# Altium PCB DIP.PcbDoc
Units mm, origin at the board's own origin, x right, y up, seen from the top; angles counter-clockwise.
Board outline 152.4 x 101.6 mm, 2 copper layers (Top Layer, Bottom Layer); 7 components, 15 nets, 43 pads, 0 vias.
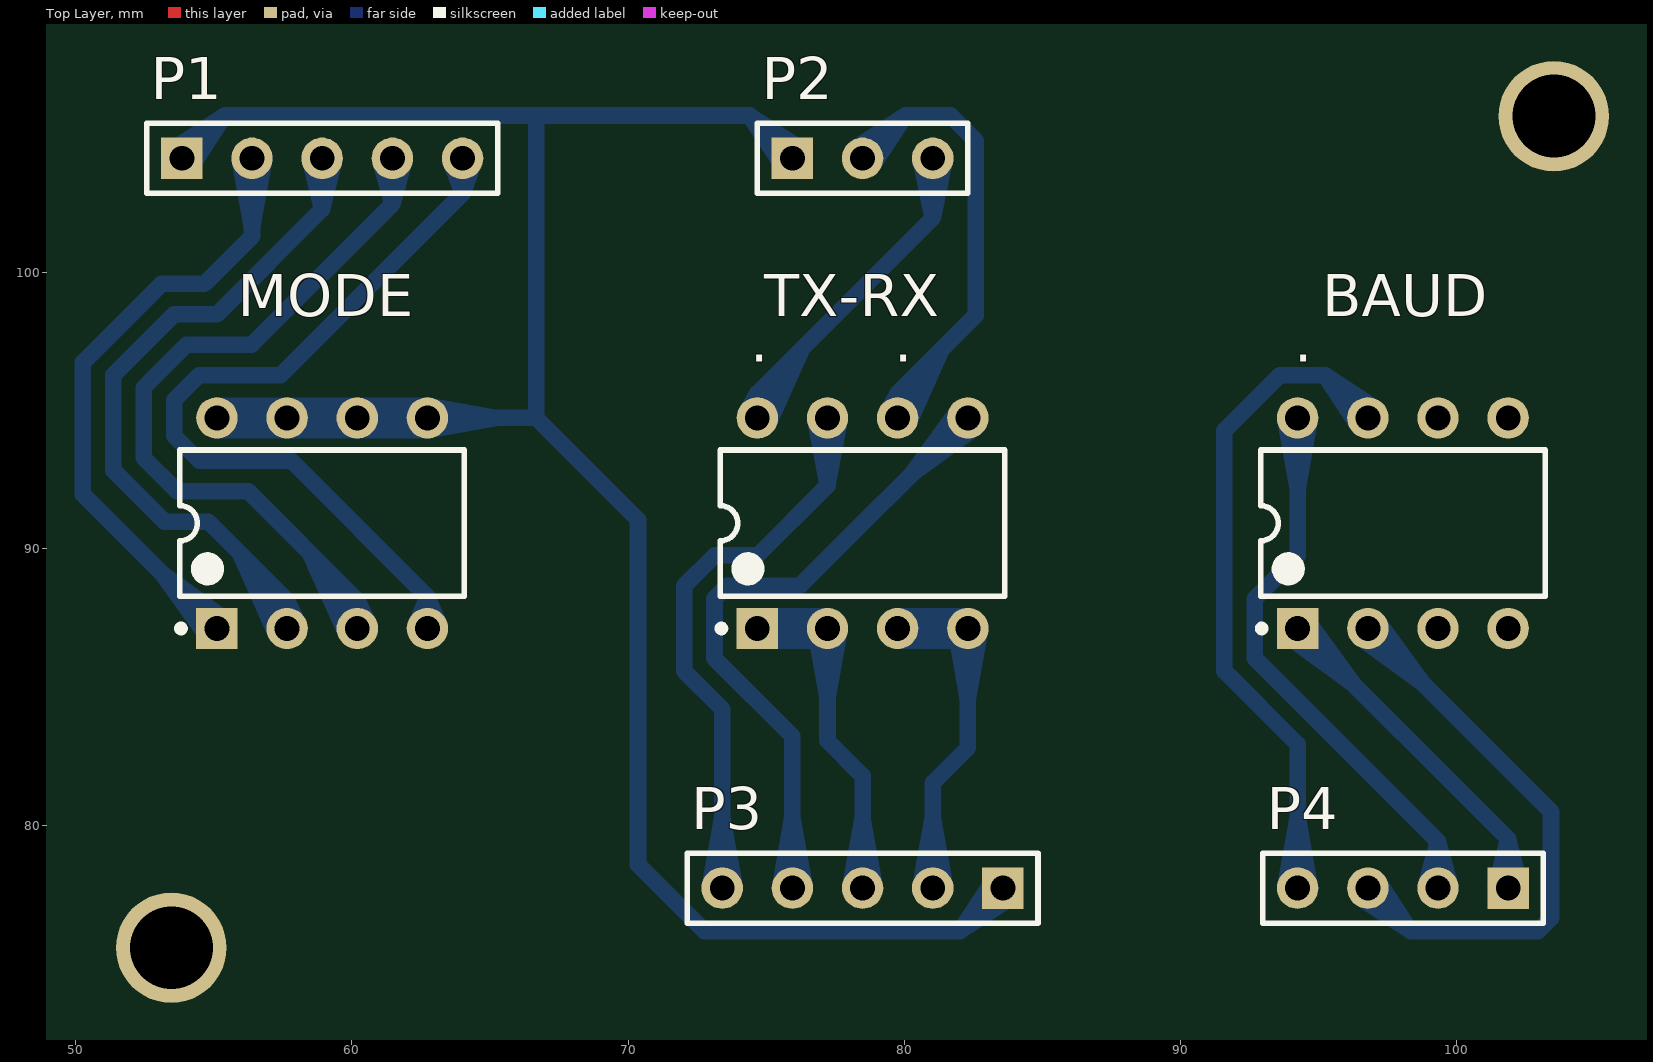
[diagram p0: Top Layer view]
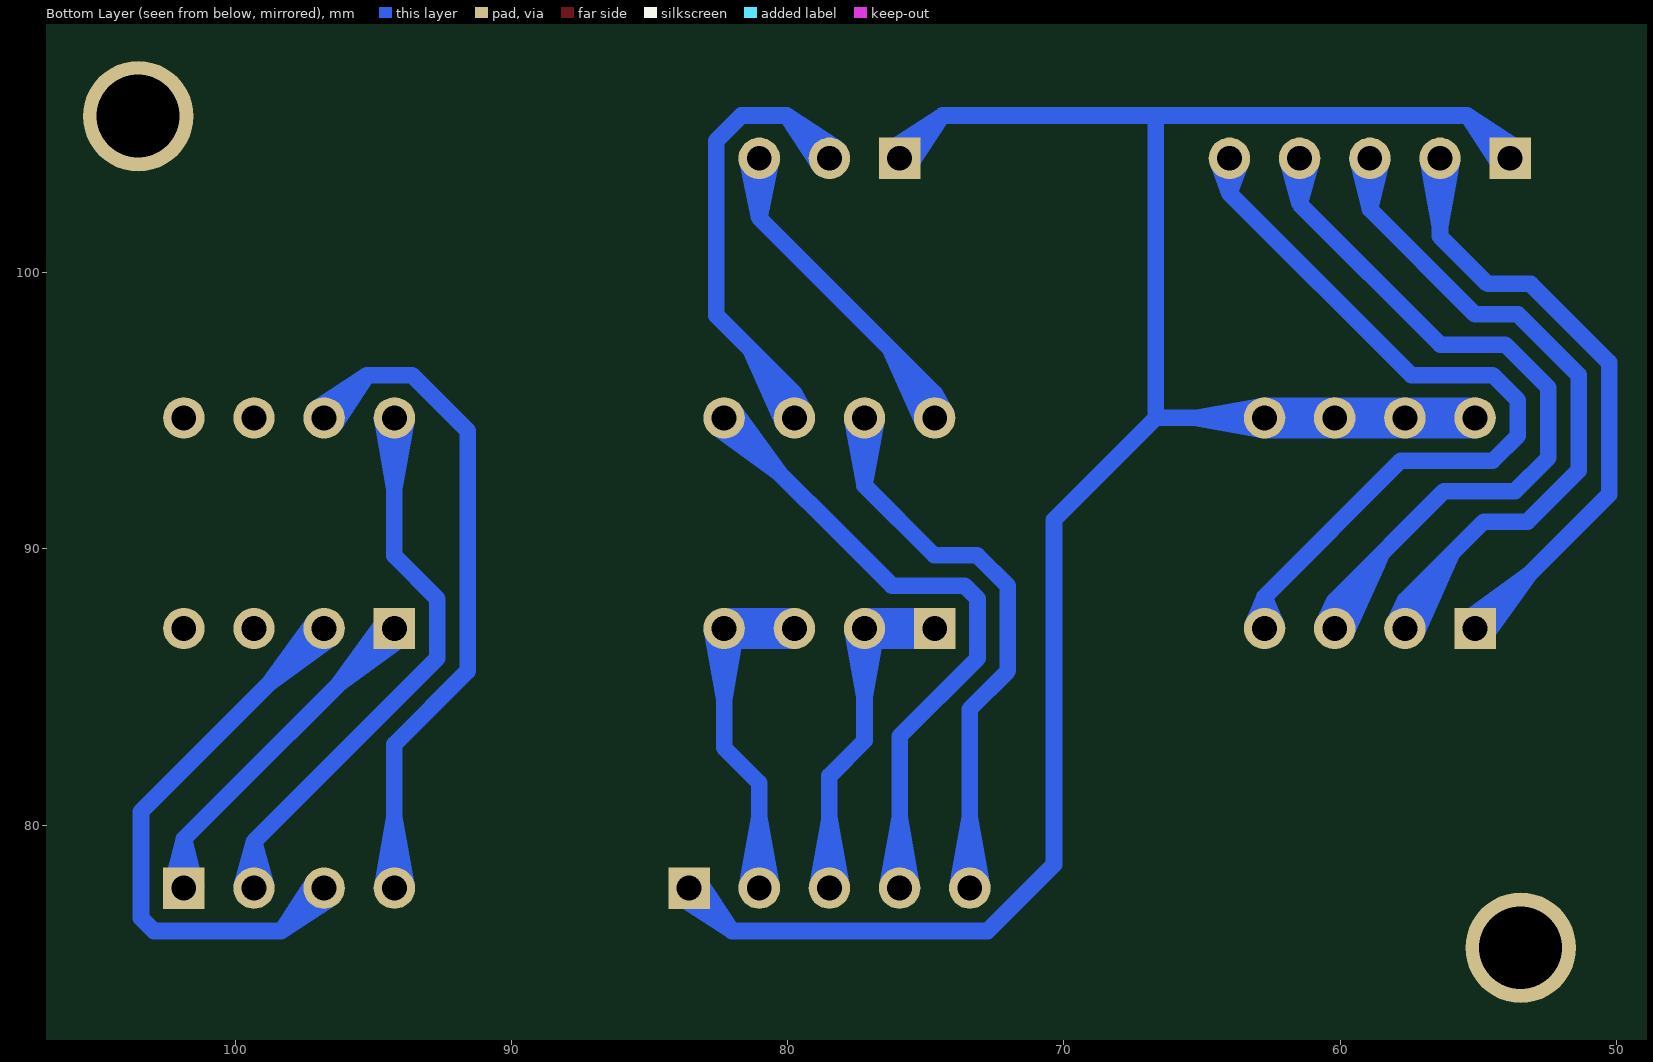
[diagram p1: Bottom Layer view, seen from below]

## Layer stack, top to bottom
Top Layer: signal copper 0.0356
Dielectric: dielectric 0.32, FR-4, Dk 4.8
Bottom Layer: signal copper 0.0356

## Board outline
25.4,25.4 177.8,25.4 177.8,127 25.4,127

## Design rules (kind name [scope] priority, off if disabled: settings)
Clearance [All] p1: gap=0.5
PolygonConnect [All] p1: connectstyle=Relief reliefconductorwidth=0.254 reliefentries=4 polygonreliefangle="90 Angle"
RoutingVias [All] p1: holewidth=0.711 width=1.27 viastyle="Through Hole" minholewidth=0.711 minwidth=1.27 maxholewidth=0.711 maxwidth=1.27
SilkscreenOverComponentPads [All] p1: minsilkscreentomaskgap=0.254
SolderMaskExpansion [All] p1: expansion=0.102
Width [All] p1: maxlimit=0.6 minlimit=0.6 preferedwidth=0.6 minimp=50.000000 maximp=50.000000 favimp=50.000000
27 further rules are at their usual default settings.

## Components (designator, comment, footprint, x,y, rotation, side; value= is the part's Value field where it differs from the comment)
BAUD "SW-DIP4" DIP-8 98.044,90.932 r90 top (schematic designator S3)
MODE "SW-DIP4" DIP-8 58.928,90.932 r90 top (schematic designator S1)
P1 "Header 5" HDR1X5 53.848,104.14 r0 top
P2 "Header 3" HDR1X3 75.946,104.14 r0 top
P3 "Header 5" HDR1X5 83.566,77.724 r180 top
P4 "Header 4" HDR1X4 101.854,77.724 r180 top
TX-RX "SW-DIP4" DIP-8 78.486,90.932 r90 top (schematic designator S2)

## Footprints (in the part's own frame and the unit in brackets; to place one, negate y for a bottom-side part, rotate by r counter-clockwise, add the part's x,y. Pads: shape width x height; smd on the part's side, far side on the other; paste and mask are expansions set on the pad)
DIP-8 [mm] "DIP; 8 Leads; Row Spacing 7.62 mm; Pitch 2.54 mm"
  rect 1.5x1.5 hole 0.9: 1(-3.81,3.81)
  round 1.5 hole 0.9: 2(-3.81,1.27) 3(-3.81,-1.27) 4(-3.81,-3.81) 5(3.81,-3.81) 6(3.81,-1.27) 7(3.81,1.27) 8(3.81,3.81)
  silkscreen extent -3.93,-5.15 2.65,5.23, body extent -3.6,-5.15 3.6,5.15, height 5.08
HDR1X3 [mm] "Connector; Header; 3 Position"
  rect 1.5x1.5 hole 0.9: 1(0,0)
  round 1.5 hole 0.9: 2(2.54,0) 3(5.08,0)
  silkscreen extent -1.27,-1.27 6.35,1.27
HDR1X4 [mm] "Connector; Header; 4 Position"
  rect 1.5x1.5 hole 0.9: 1(0,0)
  round 1.5 hole 0.9: 2(2.54,0) 3(5.08,0) 4(7.62,0)
  silkscreen extent -1.27,-1.27 8.89,1.27
HDR1X5 [mm] "Connector; Header; 5 Position"
  rect 1.5x1.5 hole 0.9: 1(0,0)
  round 1.5 hole 0.9: 2(2.54,0) 3(5.08,0) 4(7.62,0) 5(10.16,0)
  silkscreen extent -1.27,-1.27 11.43,1.27

## Part data
BAUD MODE TX-RX: "DIP Switch"
P1 P3: "Header, 5-Pin"
P2: "Header, 3-Pin"
P4: "Header, 4-Pin"

## Free pads (board coordinates)
  round 4 hole 3: 0(53.467,75.565) 0(103.505,105.664)

## Nets (pads, with @x,y where several pads share a name; then routed paths per layer and width w, separated by ;. In a path a pad name is that pad's centre, name@x,y a point inside that pad or via, vN(x,y) a via of type N, cw(c..) or ccw(c..) an arc to the next point about the centre after c; other vN are vias at no path point)
NetP1_1: MODE.5 MODE.6 MODE.7 MODE.8 P1.1 P2.1 P3.1 | length 1234.6
  Bottom Layer w0.6: P1.1@53.564,104.489 55.398,105.69 ; P1.1@53.564,104.489 55.398,105.69 ; P1.1@53.564,104.489 55.398,105.69 ; P1.1@53.564,104.489 55.398,105.69 ; P1.1 55.398,105.69 ; P1.1 55.398,105.69 ; P1.1 55.398,105.69 ; P1.1@54.197,103.856 55.398,105.69 ; P1.1@54.197,103.856 55.398,105.69 ; P1.1@54.197,103.856 55.398,105.69 ; P1.1@54.197,103.856 55.398,105.69 ; MODE.8@55.078,94.294 MODE.7@57.618,94.294 ; MODE.8@55.078,94.294 MODE.7@57.618,94.294 ; MODE.8@55.078,94.294 MODE.7@57.618,94.294 ; MODE.8@55.078,94.294 MODE.7@57.618,94.294 ; MODE.8@55.078,94.294 MODE.7@57.618,94.294 ; MODE.8@55.078,95.19 MODE.7@57.618,95.19 ; MODE.8@55.078,95.19 MODE.7@57.618,95.19 ; MODE.8@55.078,95.19 MODE.7@57.618,95.19 ; MODE.8@55.078,95.19 MODE.7@57.618,95.19 ; MODE.8@55.078,95.19 MODE.7@57.618,95.19 ; MODE.8@55.079,94.294 MODE.7@57.698,94.294 ; MODE.8@55.079,94.294 MODE.7@57.698,94.294 ; MODE.8@55.079,94.294 MODE.7@57.698,94.294 ; MODE.8@55.079,94.294 MODE.7@57.698,94.294 ; MODE.8@55.079,94.294 MODE.7@57.698,94.294 ; MODE.8@55.079,94.294 MODE.7@57.54,94.308 ; MODE.8@55.079,94.294 MODE.7@57.54,94.308 ; MODE.8@55.079,94.294 MODE.7@57.54,94.308 ; MODE.8@55.079,94.294 MODE.7@57.54,94.308 ; MODE.8@55.079,94.294 MODE.7@57.54,94.308 ; MODE.8@55.079,95.19 MODE.7@57.698,95.19 ; MODE.8@55.079,95.19 MODE.7@57.698,95.19 ; MODE.8@55.079,95.19 MODE.7@57.698,95.19 ; MODE.8@55.079,95.19 MODE.7@57.698,95.19 ; MODE.8@55.079,95.19 MODE.7@57.698,95.19 ; MODE.8@55.079,95.19 MODE.7@57.54,95.176 ; MODE.8@55.079,95.19 MODE.7@57.54,95.176 ; MODE.8@55.079,95.19 MODE.7@57.54,95.176 ; MODE.8@55.079,95.19 MODE.7@57.54,95.176 ; MODE.8@55.079,95.19 MODE.7@57.54,95.176 ; MODE.8 MODE.7 ; MODE.8 MODE.7@57.698,95.19 ; MODE.8 MODE.7 ; MODE.8 MODE.7@57.698,94.294 ; MODE.8 MODE.7 ; MODE.8 MODE.7@57.698,95.19 ; MODE.8 MODE.7 ; MODE.8 MODE.7@57.698,95.19 ; MODE.8 MODE.7 ; MODE.8 MODE.7@57.698,94.294 ; MODE.8 MODE.7 ; MODE.8 MODE.7@57.698,94.294 ; MODE.8 MODE.7 ; MODE.8 MODE.7@57.698,95.19 ; MODE.8 MODE.7 ; MODE.8 MODE.7@57.698,94.294 ; MODE.8 MODE.7 ; MODE.8 MODE.7 ; MODE.8 MODE.7@57.698,95.19 ; MODE.8 MODE.7 ; MODE.8 MODE.7@57.698,94.294 ; MODE.8 MODE.7 ; MODE.8 MODE.7@57.54,94.308 ; MODE.8 MODE.7@57.54,95.176 ; MODE.8 MODE.7@57.54,94.308 ; MODE.8 MODE.7@57.54,94.308 ; MODE.8 MODE.7@57.54,95.176 ; MODE.8 MODE.7@57.54,95.176 ; MODE.8 MODE.7@57.54,94.308 ; MODE.8 MODE.7@57.54,95.176 ; MODE.8 MODE.7@57.54,94.308 ; MODE.8 MODE.7@57.54,95.176 ; MODE.8 MODE.7 ; MODE.8 MODE.7@57.618,95.19 ; MODE.8 MODE.7@57.618,94.294 ; MODE.8 MODE.7 ; MODE.8 MODE.7@57.618,95.19 ; MODE.8 MODE.7@57.618,94.294 ; MODE.8 MODE.7 ; MODE.8 MODE.7@57.618,95.19 ; MODE.8 MODE.7@57.618,94.294 ; MODE.8 MODE.7 ; MODE.8 MODE.7@57.618,95.19 ; MODE.8 MODE.7@57.618,94.294 ; MODE.8 MODE.7 ; MODE.8 MODE.7@57.618,94.294 ; MODE.8 MODE.7@57.618,95.19 ; MODE.8 MODE.7 ; MODE.8@55.158,94.294 MODE.7 ; MODE.8@55.158,94.294 MODE.7 ; MODE.8@55.158,94.294 MODE.7 ; MODE.8@55.158,94.294 MODE.7 ; MODE.8@55.158,94.294 MODE.7 ; MODE.8@55.158,94.294 MODE.7 ; MODE.8@55.158,94.294 MODE.7 ; MODE.8@55.158,94.294 MODE.7 ; MODE.8@55.158,94.294 MODE.7 ; MODE.8@55.158,94.294 MODE.7 ; MODE.8@55.158,94.294 MODE.7 ; MODE.8@55.158,94.294 MODE.7 ; MODE.8@55.158,94.294 MODE.7 ; MODE.8@55.158,94.294 MODE.7 ; MODE.8@55.158,94.294 MODE.7 ; MODE.8@55.158,94.294 MODE.7 ; MODE.8@55.158,94.294 MODE.7 ; MODE.8@55.158,94.294 MODE.7 ; MODE.8@55.158,94.294 MODE.7 ; MODE.8@55.158,94.294 MODE.7@57.54,95.176 ; MODE.8@55.158,94.294 MODE.7@57.698,94.294 ; MODE.8@55.158,94.294 MODE.7 ; MODE.8@55.158,94.294 MODE.7@57.54,95.176 ; MODE.8@55.158,94.294 MODE.7@57.698,94.294 ; MODE.8@55.158,94.294 MODE.7 ; MODE.8@55.158,94.294 MODE.7@57.54,95.176 ; MODE.8@55.158,94.294 MODE.7@57.698,94.294 ; MODE.8@55.158,94.294 MODE.7 ; MODE.8@55.158,94.294 MODE.7@57.54,95.176 ; MODE.8@55.158,94.294 MODE.7@57.698,94.294 ; MODE.8@55.158,94.294 MODE.7 ; MODE.8@55.158,94.294 MODE.7@57.698,94.294 ; MODE.8@55.158,94.294 MODE.7@57.54,95.176 ; MODE.8@55.158,94.294 MODE.7 ; MODE.8@55.158,95.19 MODE.7 ; MODE.8@55.158,95.19 MODE.7 ; MODE.8@55.158,95.19 MODE.7 ; MODE.8@55.158,95.19 MODE.7 ; MODE.8@55.158,95.19 MODE.7 ; MODE.8@55.158,95.19 MODE.7 ; MODE.8@55.158,95.19 MODE.7 ; MODE.8@55.158,95.19 MODE.7 ; MODE.8@55.158,95.19 MODE.7 ; MODE.8@55.158,95.19 MODE.7 ; MODE.8@55.158,95.19 MODE.7 ; MODE.8@55.158,95.19 MODE.7 ; MODE.8@55.158,95.19 MODE.7 ; MODE.8@55.158,95.19 MODE.7 ; MODE.8@55.158,95.19 MODE.7 ; MODE.8@55.158,95.19 MODE.7 ; MODE.8@55.158,95.19 MODE.7 ; MODE.8@55.158,95.19 MODE.7 ; MODE.8@55.158,95.19 MODE.7 ; MODE.8@55.158,95.19 MODE.7@57.698,95.19 ; MODE.8@55.158,95.19 MODE.7@57.54,94.308 ; MODE.8@55.158,95.19 MODE.7 ; MODE.8@55.158,95.19 MODE.7@57.698,95.19 ; MODE.8@55.158,95.19 MODE.7@57.54,94.308 ; MODE.8@55.158,95.19 MODE.7 ; MODE.8@55.158,95.19 MODE.7@57.698,95.19 ; MODE.8@55.158,95.19 MODE.7@57.54,94.308 ; MODE.8@55.158,95.19 MODE.7 ; MODE.8@55.158,95.19 MODE.7@57.698,95.19 ; MODE.8@55.158,95.19 MODE.7@57.54,94.308 ; MODE.8@55.158,95.19 MODE.7 ; MODE.8@55.158,95.19 MODE.7@57.54,94.308 ; MODE.8@55.158,95.19 MODE.7@57.698,95.19 ; MODE.8@55.158,95.19 MODE.7 ; MODE.8@55.233,94.307 MODE.7@57.698,95.19 ; MODE.8@55.233,94.307 MODE.7@57.698,95.19 ; MODE.8@55.233,94.307 MODE.7@57.698,95.19 ; MODE.8@55.233,94.307 MODE.7@57.698,95.19 ; MODE.8@55.233,94.307 MODE.7@57.698,95.19 ; MODE.8@55.233,95.177 MODE.7@57.698,94.294 ; MODE.8@55.233,95.177 MODE.7@57.698,94.294 ; MODE.8@55.233,95.177 MODE.7@57.698,94.294 ; MODE.8@55.233,95.177 MODE.7@57.698,94.294 ; MODE.8@55.233,95.177 MODE.7@57.698,94.294 ; MODE.8@55.236,94.308 MODE.7@57.618,95.19 ; MODE.8@55.236,94.308 MODE.7@57.618,95.19 ; MODE.8@55.236,94.308 MODE.7@57.618,95.19 ; MODE.8@55.236,94.308 MODE.7@57.618,95.19 ; MODE.8@55.236,94.308 MODE.7@57.618,95.19 ; MODE.8@55.236,95.176 MODE.7@57.618,94.294 ; MODE.8@55.236,95.176 MODE.7@57.618,94.294 ; MODE.8@55.236,95.176 MODE.7@57.618,94.294 ; MODE.8@55.236,95.176 MODE.7@57.618,94.294 ; MODE.8@55.236,95.176 MODE.7@57.618,94.294 ; MODE.8@55.238,94.308 MODE.7@57.54,95.176 ; MODE.8@55.238,94.308 MODE.7@57.54,95.176 ; MODE.8@55.238,94.308 MODE.7@57.54,95.176 ; MODE.8@55.238,94.308 MODE.7@57.54,95.176 ; MODE.8@55.238,94.308 MODE.7@57.54,95.176 ; MODE.8@55.238,95.176 MODE.7@57.54,94.308 ; MODE.8@55.238,95.176 MODE.7@57.54,94.308 ; MODE.8@55.238,95.176 MODE.7@57.54,94.308 ; MODE.8@55.238,95.176 MODE.7@57.54,94.308 ; MODE.8@55.238,95.176 MODE.7@57.54,94.308 ; 55.398,105.69 66.675,105.69 ; MODE.7@57.618,94.294 MODE.6@60.158,94.294 ; MODE.7@57.618,94.294 MODE.6@60.158,94.294 ; MODE.7@57.618,94.294 MODE.6@60.158,94.294 ; MODE.7@57.618,94.294 MODE.6@60.158,94.294 ; MODE.7@57.618,95.19 MODE.6@60.158,95.19 ; MODE.7@57.618,95.19 MODE.6@60.158,95.19 ; MODE.7@57.618,95.19 MODE.6@60.158,95.19 ; MODE.7@57.618,95.19 MODE.6@60.158,95.19 ; MODE.7@57.619,94.294 MODE.6@60.08,94.308 ; MODE.7@57.619,94.294 MODE.6@60.238,94.294 ; MODE.7@57.619,94.294 MODE.6@60.08,94.308 ; MODE.7@57.619,94.294 MODE.6@60.08,94.308 ; MODE.7@57.619,94.294 MODE.6@60.238,94.294 ; MODE.7@57.619,94.294 MODE.6@60.238,94.294 ; MODE.7@57.619,94.294 MODE.6@60.08,94.308 ; MODE.7@57.619,94.294 MODE.6@60.238,94.294 ; MODE.7@57.619,95.19 MODE.6@60.238,95.19 ; MODE.7@57.619,95.19 MODE.6@60.08,95.176 ; MODE.7@57.619,95.19 MODE.6@60.238,95.19 ; MODE.7@57.619,95.19 MODE.6@60.238,95.19 ; MODE.7@57.619,95.19 MODE.6@60.08,95.176 ; MODE.7@57.619,95.19 MODE.6@60.08,95.176 ; MODE.7@57.619,95.19 MODE.6@60.238,95.19 ; MODE.7@57.619,95.19 MODE.6@60.08,95.176 ; MODE.7 MODE.6@60.238,95.19 ; MODE.7 MODE.6@60.08,94.308 ; MODE.7 MODE.6@60.08,95.176 ; MODE.7 MODE.6@60.238,94.294 ; MODE.7 MODE.6 ; MODE.7 MODE.6@60.238,95.19 ; MODE.7 MODE.6@60.08,94.308 ; MODE.7 MODE.6 ; MODE.7 MODE.6@60.238,95.19 ; MODE.7 MODE.6@60.08,94.308 ; MODE.7 MODE.6 ; MODE.7 MODE.6@60.08,95.176 ; MODE.7 MODE.6@60.238,94.294 ; MODE.7 MODE.6 ; MODE.7 MODE.6@60.08,95.176 ; MODE.7 MODE.6@60.238,94.294 ; MODE.7 MODE.6 ; MODE.7 MODE.6 ; MODE.7 MODE.6@60.08,94.308 ; MODE.7 MODE.6@60.238,95.19 ; MODE.7 MODE.6@60.238,94.294 ; MODE.7 MODE.6@60.08,95.176 ; MODE.7 MODE.6@60.158,95.19 ; MODE.7 MODE.6@60.158,94.294 ; MODE.7 MODE.6 ; MODE.7 MODE.6@60.158,95.19 ; MODE.7 MODE.6@60.158,94.294 ; MODE.7 MODE.6 ; MODE.7 MODE.6@60.158,95.19 ; MODE.7 MODE.6@60.158,94.294 ; MODE.7 MODE.6 ; MODE.7 MODE.6@60.158,94.294 ; MODE.7 MODE.6@60.158,95.19 ; MODE.7@57.698,94.294 MODE.6 ; MODE.7@57.698,94.294 MODE.6 ; MODE.7@57.698,94.294 MODE.6 ; MODE.7@57.698,94.294 MODE.6 ; MODE.7@57.698,94.294 MODE.6 ; MODE.7@57.698,94.294 MODE.6 ; MODE.7@57.698,94.294 MODE.6 ; MODE.7@57.698,94.294 MODE.6 ; MODE.7@57.698,94.294 MODE.6 ; MODE.7@57.698,94.294 MODE.6@60.08,95.176 ; MODE.7@57.698,94.294 MODE.6@60.238,94.294 ; MODE.7@57.698,94.294 MODE.6 ; MODE.7@57.698,94.294 MODE.6@60.08,95.176 ; MODE.7@57.698,94.294 MODE.6@60.238,94.294 ; MODE.7@57.698,94.294 MODE.6 ; MODE.7@57.698,94.294 MODE.6@60.08,95.176 ; MODE.7@57.698,94.294 MODE.6@60.238,94.294 ; MODE.7@57.698,94.294 MODE.6 ; MODE.7@57.698,94.294 MODE.6@60.238,94.294 ; MODE.7@57.698,94.294 MODE.6@60.08,95.176 ; MODE.7@57.698,95.19 MODE.6 ; MODE.7@57.698,95.19 MODE.6 ; MODE.7@57.698,95.19 MODE.6 ; MODE.7@57.698,95.19 MODE.6 ; MODE.7@57.698,95.19 MODE.6 ; MODE.7@57.698,95.19 MODE.6 ; MODE.7@57.698,95.19 MODE.6 ; MODE.7@57.698,95.19 MODE.6 ; MODE.7@57.698,95.19 MODE.6 ; MODE.7@57.698,95.19 MODE.6@60.238,95.19 ; MODE.7@57.698,95.19 MODE.6@60.08,94.308 ; MODE.7@57.698,95.19 MODE.6 ; MODE.7@57.698,95.19 MODE.6@60.238,95.19 ; MODE.7@57.698,95.19 MODE.6@60.08,94.308 ; MODE.7@57.698,95.19 MODE.6 ; MODE.7@57.698,95.19 MODE.6@60.238,95.19 ; MODE.7@57.698,95.19 MODE.6@60.08,94.308 ; MODE.7@57.698,95.19 MODE.6 ; MODE.7@57.698,95.19 MODE.6@60.08,94.308 ; MODE.7@57.698,95.19 MODE.6@60.238,95.19 ; MODE.7@57.773,94.307 MODE.6@60.238,95.19 ; MODE.7@57.773,94.307 MODE.6@60.238,95.19 ; MODE.7@57.773,94.307 MODE.6@60.238,95.19 ; MODE.7@57.773,94.307 MODE.6@60.238,95.19 ; MODE.7@57.773,95.177 MODE.6@60.238,94.294 ; MODE.7@57.773,95.177 MODE.6@60.238,94.294 ; MODE.7@57.773,95.177 MODE.6@60.238,94.294 ; MODE.7@57.773,95.177 MODE.6@60.238,94.294 ; MODE.7@57.776,94.308 MODE.6@60.158,95.19 ; MODE.7@57.776,94.308 MODE.6@60.158,95.19 ; MODE.7@57.776,94.308 MODE.6@60.158,95.19 ; MODE.7@57.776,94.308 MODE.6@60.158,95.19 ; MODE.7@57.776,95.176 MODE.6@60.158,94.294 ; MODE.7@57.776,95.176 MODE.6@60.158,94.294 ; MODE.7@57.776,95.176 MODE.6@60.158,94.294 ; MODE.7@57.776,95.176 MODE.6@60.158,94.294 ; MODE.7@57.778,94.308 MODE.6@60.08,95.176 ; MODE.7@57.778,94.308 MODE.6@60.08,95.176 ; MODE.7@57.778,94.308 MODE.6@60.08,95.176 ; MODE.7@57.778,94.308 MODE.6@60.08,95.176 ; MODE.7@57.778,95.176 MODE.6@60.08,94.308 ; MODE.7@57.778,95.176 MODE.6@60.08,94.308 ; MODE.7@57.778,95.176 MODE.6@60.08,94.308 ; MODE.7@57.778,95.176 MODE.6@60.08,94.308 ; MODE.6@60.158,94.294 MODE.5@62.698,94.294 ; MODE.6@60.158,94.294 MODE.5@62.698,94.294 ; MODE.6@60.158,94.294 MODE.5@62.698,94.294 ; MODE.6@60.158,94.294 MODE.5@62.698,94.294 ; MODE.6@60.158,95.19 MODE.5@62.698,95.19 ; MODE.6@60.158,95.19 MODE.5@62.698,95.19 ; MODE.6@60.158,95.19 MODE.5@62.698,95.19 ; MODE.6@60.158,95.19 MODE.5@62.698,95.19 ; MODE.6@60.159,94.294 MODE.5@62.62,94.308 ; MODE.6@60.159,94.294 MODE.5@62.778,94.294 ; MODE.6@60.159,94.294 MODE.5@62.62,94.308 ; MODE.6@60.159,94.294 MODE.5@62.62,94.308 ; MODE.6@60.159,94.294 MODE.5@62.778,94.294 ; MODE.6@60.159,94.294 MODE.5@62.778,94.294 ; MODE.6@60.159,94.294 MODE.5@62.62,94.308 ; MODE.6@60.159,94.294 MODE.5@62.778,94.294 ; MODE.6@60.159,95.19 MODE.5@62.778,95.19 ; MODE.6@60.159,95.19 MODE.5@62.62,95.176 ; MODE.6@60.159,95.19 MODE.5@62.778,95.19 ; MODE.6@60.159,95.19 MODE.5@62.778,95.19 ; MODE.6@60.159,95.19 MODE.5@62.62,95.176 ; MODE.6@60.159,95.19 MODE.5@62.62,95.176 ; MODE.6@60.159,95.19 MODE.5@62.778,95.19 ; MODE.6@60.159,95.19 MODE.5@62.62,95.176 ; MODE.6 MODE.5@62.778,95.19 ; MODE.6 MODE.5@62.62,94.308 ; MODE.6 MODE.5@62.62,95.176 ; MODE.6 MODE.5@62.778,94.294 ; MODE.6 MODE.5 ; MODE.6 MODE.5@62.778,95.19 ; MODE.6 MODE.5@62.62,94.308 ; MODE.6 MODE.5 ; MODE.6 MODE.5@62.778,95.19 ; MODE.6 MODE.5@62.62,94.308 ; MODE.6 MODE.5 ; MODE.6 MODE.5@62.62,95.176 ; MODE.6 MODE.5@62.778,94.294 ; MODE.6 MODE.5 ; MODE.6 MODE.5@62.62,95.176 ; MODE.6 MODE.5@62.778,94.294 ; MODE.6 MODE.5 ; MODE.6 MODE.5 ; MODE.6 MODE.5@62.62,94.308 ; MODE.6 MODE.5@62.778,95.19 ; MODE.6 MODE.5@62.778,94.294 ; MODE.6 MODE.5@62.62,95.176 ; MODE.6 MODE.5@62.698,95.19 ; MODE.6 MODE.5@62.698,94.294 ; MODE.6 MODE.5 ; MODE.6 MODE.5@62.698,95.19 ; MODE.6 MODE.5@62.698,94.294 ; MODE.6 MODE.5 ; MODE.6 MODE.5@62.698,95.19 ; MODE.6 MODE.5@62.698,94.294 ; MODE.6 MODE.5 ; MODE.6 MODE.5@62.698,94.294 ; MODE.6 MODE.5@62.698,95.19 ; MODE.6@60.238,94.294 MODE.5 ; MODE.6@60.238,94.294 MODE.5 ; MODE.6@60.238,94.294 MODE.5 ; MODE.6@60.238,94.294 MODE.5 ; MODE.6@60.238,94.294 MODE.5 ; MODE.6@60.238,94.294 MODE.5 ; MODE.6@60.238,94.294 MODE.5 ; MODE.6@60.238,94.294 MODE.5 ; MODE.6@60.238,94.294 MODE.5 ; MODE.6@60.238,94.294 MODE.5@62.62,95.176 ; MODE.6@60.238,94.294 MODE.5@62.778,94.294 ; MODE.6@60.238,94.294 MODE.5 ; MODE.6@60.238,94.294 MODE.5@62.62,95.176 ; MODE.6@60.238,94.294 MODE.5@62.778,94.294 ; MODE.6@60.238,94.294 MODE.5 ; MODE.6@60.238,94.294 MODE.5@62.62,95.176 ; MODE.6@60.238,94.294 MODE.5@62.778,94.294 ; MODE.6@60.238,94.294 MODE.5 ; MODE.6@60.238,94.294 MODE.5@62.778,94.294 ; MODE.6@60.238,94.294 MODE.5@62.62,95.176 ; MODE.6@60.238,95.19 MODE.5 ; MODE.6@60.238,95.19 MODE.5 ; MODE.6@60.238,95.19 MODE.5 ; MODE.6@60.238,95.19 MODE.5 ; MODE.6@60.238,95.19 MODE.5 ; MODE.6@60.238,95.19 MODE.5 ; MODE.6@60.238,95.19 MODE.5 ; MODE.6@60.238,95.19 MODE.5 ; MODE.6@60.238,95.19 MODE.5 ; MODE.6@60.238,95.19 MODE.5@62.778,95.19 ; MODE.6@60.238,95.19 MODE.5@62.62,94.308 ; MODE.6@60.238,95.19 MODE.5 ; MODE.6@60.238,95.19 MODE.5@62.778,95.19 ; MODE.6@60.238,95.19 MODE.5@62.62,94.308 ; MODE.6@60.238,95.19 MODE.5 ; MODE.6@60.238,95.19 MODE.5@62.778,95.19 ; MODE.6@60.238,95.19 MODE.5@62.62,94.308 ; MODE.6@60.238,95.19 MODE.5 ; MODE.6@60.238,95.19 MODE.5@62.62,94.308 ; MODE.6@60.238,95.19 MODE.5@62.778,95.19 ; MODE.6@60.313,94.307 MODE.5@62.778,95.19 ; MODE.6@60.313,94.307 MODE.5@62.778,95.19 ; MODE.6@60.313,94.307 MODE.5@62.778,95.19 ; MODE.6@60.313,94.307 MODE.5@62.778,95.19 ; MODE.6@60.313,95.177 MODE.5@62.778,94.294 ; MODE.6@60.313,95.177 MODE.5@62.778,94.294 ; MODE.6@60.313,95.177 MODE.5@62.778,94.294 ; MODE.6@60.313,95.177 MODE.5@62.778,94.294 ; MODE.6@60.316,94.308 MODE.5@62.698,95.19 ; MODE.6@60.316,94.308 MODE.5@62.698,95.19 ; MODE.6@60.316,94.308 MODE.5@62.698,95.19 ; MODE.6@60.316,94.308 MODE.5@62.698,95.19 ; MODE.6@60.316,95.176 MODE.5@62.698,94.294 ; MODE.6@60.316,95.176 MODE.5@62.698,94.294 ; MODE.6@60.316,95.176 MODE.5@62.698,94.294 ; MODE.6@60.316,95.176 MODE.5@62.698,94.294 ; MODE.6@60.318,94.308 MODE.5@62.62,95.176 ; MODE.6@60.318,94.308 MODE.5@62.62,95.176 ; MODE.6@60.318,94.308 MODE.5@62.62,95.176 ; MODE.6@60.318,94.308 MODE.5@62.62,95.176 ; MODE.6@60.318,95.176 MODE.5@62.62,94.308 ; MODE.6@60.318,95.176 MODE.5@62.62,94.308 ; MODE.6@60.318,95.176 MODE.5@62.62,94.308 ; MODE.6@60.318,95.176 MODE.5@62.62,94.308 ; MODE.5 65.288,94.742 ; MODE.5 65.288,94.742 ; MODE.5 66.675,94.742 ; MODE.5@62.778,94.294 65.288,94.742 ; MODE.5@62.778,94.294 65.288,94.742 ; MODE.5@62.778,94.294 65.288,94.742 ; MODE.5@62.778,94.294 65.288,94.742 ; MODE.5@62.778,95.19 65.288,94.742 ; MODE.5@62.778,95.19 65.288,94.742 ; MODE.5@62.778,95.19 65.288,94.742 ; MODE.5@62.778,95.19 65.288,94.742 ; 66.675,94.742 70.358,91.059 70.358,78.58 72.764,76.174 82.016,76.174 ; 66.675,94.742 66.675,105.69 ; 66.675,105.69 74.396,105.69 ; 74.396,105.69 P2.1@76.23,104.489 ; 74.396,105.69 P2.1@75.597,103.856 ; 74.396,105.69 P2.1 ; 74.396,105.69 P2.1@76.23,104.489 ; 74.396,105.69 P2.1@75.597,103.856 ; 74.396,105.69 P2.1 ; 74.396,105.69 P2.1@76.23,104.489 ; 74.396,105.69 P2.1@75.597,103.856 ; 74.396,105.69 P2.1 ; 74.396,105.69 P2.1@75.597,103.856 ; 74.396,105.69 P2.1@76.23,104.489 ; 82.016,76.174 P3.1 ; 82.016,76.174 P3.1@83.217,78.008 ; 82.016,76.174 P3.1@83.85,77.375 ; 82.016,76.174 P3.1 ; 82.016,76.174 P3.1@83.217,78.008 ; 82.016,76.174 P3.1@83.85,77.375 ; 82.016,76.174 P3.1 ; 82.016,76.174 P3.1@83.217,78.008 ; 82.016,76.174 P3.1@83.85,77.375 ; 82.016,76.174 P3.1 ; 82.016,76.174 P3.1@83.217,78.008 ; 82.016,76.174 P3.1@83.85,77.375 ; 82.016,76.174 P3.1 ; 82.016,76.174 P3.1@83.85,77.375 ; 82.016,76.174 P3.1@83.217,78.008 ; 82.016,76.174 P3.1
NetP1_2: MODE.1 P1.2 | length 103.6
  Bottom Layer w0.6: 53.095,89.145 MODE.1 ; 53.095,89.145 MODE.1@55.41,87.464 ; 53.095,89.145 MODE.1@54.776,86.83 ; 53.095,89.145 MODE.1 ; 53.095,89.145 MODE.1@55.41,87.464 ; 53.095,89.145 MODE.1@54.776,86.83 ; 53.095,89.145 MODE.1 ; 53.095,89.145 MODE.1@55.41,87.464 ; 53.095,89.145 MODE.1@54.776,86.83 ; 53.095,89.145 MODE.1 ; 53.095,89.145 MODE.1@55.41,87.464 ; 53.095,89.145 MODE.1@54.776,86.83 ; 53.095,89.145 MODE.1@54.776,86.83 ; 53.095,89.145 MODE.1@55.41,87.464 ; 53.095,89.145 MODE.1 ; MODE.1 50.268,91.972 50.268,96.751 53.109,99.592 54.665,99.592 56.388,101.315 P1.2 ; P1.2@55.94,104.1 56.388,101.59 ; P1.2@55.94,104.1 56.388,101.59 ; P1.2@55.94,104.1 56.388,101.59 ; P1.2@55.94,104.1 56.388,101.59 ; P1.2@55.94,104.1 56.388,101.59 ; 56.388,101.59 P1.2 ; 56.388,101.59 P1.2@56.836,104.1 ; 56.388,101.59 P1.2 ; 56.388,101.59 P1.2@56.836,104.1 ; 56.388,101.59 P1.2 ; 56.388,101.59 P1.2@56.836,104.1 ; 56.388,101.59 P1.2 ; 56.388,101.59 P1.2@56.836,104.1 ; 56.388,101.59 P1.2@56.836,104.1 ; 56.388,101.59 P1.2
NetP1_3: MODE.2 P1.3 | length 120.7
  Bottom Layer w0.6: MODE.2@57.254,86.924 56.241,89.501 ; MODE.2@57.258,86.916 56.232,89.397 ; MODE.2@57.263,86.906 56.134,89.435 ; MODE.2@57.658,87.031 MODE.2 ; MODE.2@57.658,87.213 MODE.2 ; MODE.2@58.012,87.399 56.134,89.435 ; MODE.2@58.018,87.392 56.232,89.397 ; MODE.2@58.025,87.383 56.241,89.501 ; 55.951,89.845 MODE.2 ; 55.951,89.845 58.022,87.387 55.951,89.845 ; 55.951,89.845 57.261,86.91 55.951,89.845 ; 55.951,89.845 MODE.2 ; 56.134,89.435 MODE.2 ; 56.232,89.397 MODE.2 ; 56.241,89.501 MODE.2 ; MODE.2@57.219,87.222 57.658,88.138 ; MODE.2@57.219,87.222 57.658,88.138 ; MODE.2@57.219,87.222 57.658,88.138 ; MODE.2@57.219,87.222 57.658,88.138 ; MODE.2@57.219,87.222 57.658,88.138 ; MODE.2@57.219,87.222 57.658,88.138 ; MODE.2@57.219,87.222 57.658,88.138 ; MODE.2@57.219,87.222 57.658,88.138 ; MODE.2@57.219,87.222 57.658,88.138 ; MODE.2 57.658,88.138 ; MODE.2 57.658,88.138 ; MODE.2 57.658,88.138 ; MODE.2 57.658,88.138 ; MODE.2 57.658,88.138 ; MODE.2 57.658,88.138 ; MODE.2 57.658,88.138 ; 57.658,88.138 MODE.2@58.097,87.222 ; 57.658,88.138 MODE.2@58.097,87.222 ; 57.658,88.138 MODE.2@58.097,87.222 ; 57.658,88.138 MODE.2@58.097,87.222 ; 57.658,88.138 MODE.2@58.097,87.222 ; 57.658,88.138 MODE.2@58.097,87.222 ; 57.658,88.138 MODE.2@58.097,87.222 ; 57.658,88.138 54.804,90.992 53.217,90.992 51.368,92.841 51.368,96.295 53.565,98.492 55.12,98.492 58.928,102.3 ; 57.658,88.138 MODE.2@58.097,87.222 ; 57.658,88.138 MODE.2@58.097,87.222 ; P1.3@58.481,104.085 58.928,102.3 ; P1.3@58.481,104.085 58.928,102.3 ; P1.3@58.481,104.085 58.928,102.3 ; P1.3@58.481,104.085 58.928,102.3 ; P1.3@58.481,104.085 58.928,102.3 ; 58.928,102.3 P1.3 ; 58.928,102.3 P1.3@59.375,104.085 ; 58.928,102.3 P1.3 ; 58.928,102.3 P1.3@59.375,104.085 ; 58.928,102.3 P1.3 ; 58.928,102.3 P1.3@59.375,104.085 ; 58.928,102.3 P1.3 ; 58.928,102.3 P1.3@59.375,104.085 ; 58.928,102.3 P1.3 ; 58.928,102.3 P1.3@59.375,104.085 ; 58.928,102.3 P1.3
NetP1_4: MODE.3 P1.4 | length 120.2
  Bottom Layer w0.6: MODE.3@59.794,86.923 58.777,89.501 ; MODE.3@59.799,86.915 58.765,89.395 ; MODE.3@59.804,86.904 58.663,89.43 ; MODE.3@60.198,87.154 MODE.3 ; MODE.3@60.551,87.401 58.663,89.43 ; MODE.3@60.557,87.393 58.765,89.395 ; MODE.3@60.564,87.383 58.777,89.501 ; 58.463,89.873 MODE.3 ; 58.463,89.873 60.561,87.388 58.463,89.873 ; 58.463,89.873 59.802,86.909 58.463,89.873 ; 58.463,89.873 MODE.3 ; 58.663,89.43 MODE.3 ; 58.765,89.395 MODE.3 ; 58.777,89.501 MODE.3 ; MODE.3@59.759,87.222 60.198,88.138 ; MODE.3@59.759,87.222 60.198,88.138 ; MODE.3@59.759,87.222 60.198,88.138 ; MODE.3@59.759,87.222 60.198,88.138 ; MODE.3@59.759,87.222 60.198,88.138 ; MODE.3@59.759,87.222 60.198,88.138 ; MODE.3@59.759,87.222 60.198,88.138 ; MODE.3@59.759,87.222 60.198,88.138 ; MODE.3@59.759,87.222 60.198,88.138 ; MODE.3 60.198,88.138 ; MODE.3 60.198,88.138 ; MODE.3 60.198,88.138 ; MODE.3 60.198,88.138 ; MODE.3 60.198,88.138 ; MODE.3 60.198,88.138 ; MODE.3 60.198,88.138 ; 60.198,88.138 MODE.3@60.637,87.222 ; 60.198,88.138 MODE.3@60.637,87.222 ; 60.198,88.138 MODE.3@60.637,87.222 ; 60.198,88.138 MODE.3@60.637,87.222 ; 60.198,88.138 MODE.3@60.637,87.222 ; 60.198,88.138 MODE.3@60.637,87.222 ; 60.198,88.138 MODE.3@60.637,87.222 ; 60.198,88.138 56.244,92.092 53.672,92.092 52.468,93.296 52.468,95.84 54.02,97.392 56.371,97.392 61.468,102.489 ; 60.198,88.138 MODE.3@60.637,87.222 ; 60.198,88.138 MODE.3@60.637,87.222 ; P1.4@61.022,104.079 61.468,102.489 ; P1.4@61.022,104.079 61.468,102.489 ; P1.4@61.022,104.079 61.468,102.489 ; P1.4@61.022,104.079 61.468,102.489 ; P1.4@61.022,104.079 61.468,102.489 ; 61.468,102.489 P1.4 ; 61.468,102.489 P1.4@61.914,104.079 ; 61.468,102.489 P1.4 ; 61.468,102.489 P1.4@61.914,104.079 ; 61.468,102.489 P1.4 ; 61.468,102.489 P1.4@61.914,104.079 ; 61.468,102.489 P1.4 ; 61.468,102.489 P1.4@61.914,104.079 ; 61.468,102.489 P1.4 ; 61.468,102.489 P1.4@61.914,104.079 ; 61.468,102.489 P1.4
NetP1_5: MODE.4 P1.5 | length 53
  Bottom Layer w0.6: MODE.4@62.738,87.154 MODE.4 ; MODE.4@62.297,87.211 62.738,88.265 ; MODE.4@62.297,87.211 62.738,88.265 ; MODE.4@62.297,87.211 62.738,88.265 ; MODE.4@62.297,87.211 62.738,88.265 ; MODE.4 62.738,88.265 ; MODE.4 62.738,88.265 ; MODE.4 62.738,88.265 ; 62.738,88.265 MODE.4@63.179,87.211 ; 62.738,88.265 MODE.4@63.179,87.211 ; 62.738,88.265 MODE.4@63.179,87.211 ; 62.738,88.265 57.811,93.192 54.476,93.192 53.568,94.1 53.568,95.384 54.476,96.292 57.43,96.292 64.008,102.87 ; 62.738,88.265 MODE.4@63.179,87.211 ; P1.5@63.565,104.06 64.008,102.87 ; P1.5@63.565,104.06 64.008,102.87 ; P1.5@63.565,104.06 64.008,102.87 ; P1.5@63.565,104.06 64.008,102.87 ; 64.008,102.87 P1.5@64.451,104.06 ; 64.008,102.87 P1.5 ; 64.008,102.87 P1.5@64.451,104.06 ; 64.008,102.87 P1.5 ; 64.008,102.87 P1.5@64.451,104.06 ; 64.008,102.87 P1.5 ; 64.008,102.87 P1.5@64.451,104.06
NetP2_2: P2.3 TX-RX.8 | length 32
  Bottom Layer w0.6: TX-RX.8@74.318,95.014 76.313,97.268 ; TX-RX.8@75.071,94.526 76.313,97.268 ; P2.3@80.578,104.093 81.026,101.981 ; P2.3@81.474,104.093 81.026,101.981 ; TX-RX.8 74.676,95.631 ; TX-RX.8 76.313,97.268 ; TX-RX.8 74.676,95.631 ; 74.676,95.631 75.111,94.856 74.676,95.631 ; 74.676,95.631 74.241,94.856 74.676,95.631 ; 74.676,95.631 81.026,101.981 ; 81.026,101.981 P2.3 81.026,101.981
NetP2_3: P2.2 TX-RX.6 | length 33.9
  Bottom Layer w0.6: P2.2@78.202,104.489 80.036,105.69 ; P2.2 80.036,105.69 ; P2.2@78.835,103.856 80.036,105.69 ; TX-RX.6@79.397,95.013 81.334,97.209 ; TX-RX.6@80.153,94.529 81.334,97.209 ; TX-RX.6 79.756,95.631 ; TX-RX.6 81.334,97.209 ; TX-RX.6 79.756,95.631 ; 79.756,95.631 80.191,94.856 79.756,95.631 ; 79.756,95.631 79.321,94.856 79.756,95.631 ; 79.756,95.631 82.576,98.451 82.576,104.782 81.668,105.69 80.036,105.69
NetP3_2: P3.2 TX-RX.3 TX-RX.4 | length 368.4
  Bottom Layer w0.6: P3.2@80.899,77.851 P3.2 ; TX-RX.3@79.716,86.674 TX-RX.4@82.256,86.674 ; TX-RX.3@79.716,86.674 TX-RX.4@82.256,86.674 ; TX-RX.3@79.716,86.674 TX-RX.4@82.256,86.674 ; TX-RX.3@79.716,86.674 TX-RX.4@82.256,86.674 ; TX-RX.3@79.716,87.57 TX-RX.4@82.256,87.57 ; TX-RX.3@79.716,87.57 TX-RX.4@82.256,87.57 ; TX-RX.3@79.716,87.57 TX-RX.4@82.256,87.57 ; TX-RX.3@79.716,87.57 TX-RX.4@82.256,87.57 ; TX-RX.3@79.717,86.674 TX-RX.4@82.178,86.688 ; TX-RX.3@79.717,86.674 TX-RX.4@82.178,86.688 ; TX-RX.3@79.717,86.674 TX-RX.4@82.178,86.688 ; TX-RX.3@79.717,86.674 TX-RX.4@82.178,86.688 ; TX-RX.3@79.717,86.674 TX-RX.4@82.336,86.674 ; TX-RX.3@79.717,86.674 TX-RX.4@82.336,86.674 ; TX-RX.3@79.717,86.674 TX-RX.4@82.336,86.674 ; TX-RX.3@79.717,86.674 TX-RX.4@82.336,86.674 ; TX-RX.3@79.717,87.57 TX-RX.4@82.336,87.57 ; TX-RX.3@79.717,87.57 TX-RX.4@82.178,87.556 ; TX-RX.3@79.717,87.57 TX-RX.4@82.336,87.57 ; TX-RX.3@79.717,87.57 TX-RX.4@82.336,87.57 ; TX-RX.3@79.717,87.57 TX-RX.4@82.178,87.556 ; TX-RX.3@79.717,87.57 TX-RX.4@82.178,87.556 ; TX-RX.3@79.717,87.57 TX-RX.4@82.336,87.57 ; TX-RX.3@79.717,87.57 TX-RX.4@82.178,87.556 ; TX-RX.3 TX-RX.4@82.336,87.57 ; TX-RX.3 TX-RX.4@82.178,86.688 ; TX-RX.3 TX-RX.4@82.178,87.556 ; TX-RX.3 TX-RX.4 ; TX-RX.3 TX-RX.4@82.336,87.57 ; TX-RX.3 TX-RX.4@82.178,86.688 ; TX-RX.3 TX-RX.4 ; TX-RX.3 TX-RX.4@82.336,87.57 ; TX-RX.3 TX-RX.4@82.178,86.688 ; TX-RX.3 TX-RX.4 ; TX-RX.3 TX-RX.4@82.178,87.556 ; TX-RX.3 TX-RX.4 ; TX-RX.3 TX-RX.4@82.178,87.556 ; TX-RX.3 TX-RX.4 ; TX-RX.3 TX-RX.4 ; TX-RX.3 TX-RX.4@82.178,86.688 ; TX-RX.3 TX-RX.4@82.336,87.57 ; TX-RX.3 TX-RX.4@82.178,87.556 ; TX-RX.3 TX-RX.4@82.336,86.674 ; TX-RX.3 TX-RX.4@82.336,86.674 ; TX-RX.3 TX-RX.4@82.336,86.674 ; TX-RX.3 TX-RX.4@82.336,86.674 ; TX-RX.3 TX-RX.4@82.256,87.57 ; TX-RX.3 TX-RX.4@82.256,86.674 ; TX-RX.3 TX-RX.4 ; TX-RX.3 TX-RX.4@82.256,87.57 ; TX-RX.3 TX-RX.4@82.256,86.674 ; TX-RX.3 TX-RX.4 ; TX-RX.3 TX-RX.4@82.256,87.57 ; TX-RX.3 TX-RX.4@82.256,86.674 ; TX-RX.3 TX-RX.4 ; TX-RX.3 TX-RX.4@82.256,86.674 ; TX-RX.3 TX-RX.4@82.256,87.57 ; TX-RX.3@79.796,86.674 TX-RX.4 ; TX-RX.3@79.796,86.674 TX-RX.4 ; TX-RX.3@79.796,86.674 TX-RX.4 ; TX-RX.3@79.796,86.674 TX-RX.4 ; TX-RX.3@79.796,86.674 TX-RX.4 ; TX-RX.3@79.796,86.674 TX-RX.4 ; TX-RX.3@79.796,86.674 TX-RX.4 ; TX-RX.3@79.796,86.674 TX-RX.4 ; TX-RX.3@79.796,86.674 TX-RX.4 ; TX-RX.3@79.796,86.674 TX-RX.4@82.178,87.556 ; TX-RX.3@79.796,86.674 TX-RX.4@82.336,86.674 ; TX-RX.3@79.796,86.674 TX-RX.4 ; TX-RX.3@79.796,86.674 TX-RX.4@82.178,87.556 ; TX-RX.3@79.796,86.674 TX-RX.4@82.336,86.674 ; TX-RX.3@79.796,86.674 TX-RX.4 ; TX-RX.3@79.796,86.674 TX-RX.4@82.178,87.556 ; TX-RX.3@79.796,86.674 TX-RX.4@82.336,86.674 ; TX-RX.3@79.796,86.674 TX-RX.4 ; TX-RX.3@79.796,86.674 TX-RX.4@82.336,86.674 ; TX-RX.3@79.796,86.674 TX-RX.4@82.178,87.556 ; TX-RX.3@79.796,87.57 TX-RX.4 ; TX-RX.3@79.796,87.57 TX-RX.4 ; TX-RX.3@79.796,87.57 TX-RX.4 ; TX-RX.3@79.796,87.57 TX-RX.4 ; TX-RX.3@79.796,87.57 TX-RX.4 ; TX-RX.3@79.796,87.57 TX-RX.4 ; TX-RX.3@79.796,87.57 TX-RX.4 ; TX-RX.3@79.796,87.57 TX-RX.4 ; TX-RX.3@79.796,87.57 TX-RX.4 ; TX-RX.3@79.796,87.57 TX-RX.4@82.336,87.57 ; TX-RX.3@79.796,87.57 TX-RX.4@82.178,86.688 ; TX-RX.3@79.796,87.57 TX-RX.4 ; TX-RX.3@79.796,87.57 TX-RX.4@82.336,87.57 ; TX-RX.3@79.796,87.57 TX-RX.4@82.178,86.688 ; TX-RX.3@79.796,87.57 TX-RX.4 ; TX-RX.3@79.796,87.57 TX-RX.4@82.336,87.57 ; TX-RX.3@79.796,87.57 TX-RX.4@82.178,86.688 ; TX-RX.3@79.796,87.57 TX-RX.4 ; TX-RX.3@79.796,87.57 TX-RX.4@82.178,86.688 ; TX-RX.3@79.796,87.57 TX-RX.4@82.336,87.57 ; TX-RX.3@79.871,86.687 TX-RX.4@82.336,87.57 ; TX-RX.3@79.871,86.687 TX-RX.4@82.336,87.57 ; TX-RX.3@79.871,86.687 TX-RX.4@82.336,87.57 ; TX-RX.3@79.871,86.687 TX-RX.4@82.336,87.57 ; TX-RX.3@79.871,87.557 TX-RX.4@82.336,86.674 ; TX-RX.3@79.871,87.557 TX-RX.4@82.336,86.674 ; TX-RX.3@79.871,87.557 TX-RX.4@82.336,86.674 ; TX-RX.3@79.871,87.557 TX-RX.4@82.336,86.674 ; TX-RX.3@79.874,86.688 TX-RX.4@82.256,87.57 ; TX-RX.3@79.874,86.688 TX-RX.4@82.256,87.57 ; TX-RX.3@79.874,86.688 TX-RX.4@82.256,87.57 ; TX-RX.3@79.874,86.688 TX-RX.4@82.256,87.57 ; TX-RX.3@79.874,87.556 TX-RX.4@82.256,86.674 ; TX-RX.3@79.874,87.556 TX-RX.4@82.256,86.674 ; TX-RX.3@79.874,87.556 TX-RX.4@82.256,86.674 ; TX-RX.3@79.874,87.556 TX-RX.4@82.256,86.674 ; TX-RX.3@79.876,86.688 TX-RX.4@82.178,87.556 ; TX-RX.3@79.876,86.688 TX-RX.4@82.178,87.556 ; TX-RX.3@79.876,86.688 TX-RX.4@82.178,87.556 ; TX-RX.3@79.876,86.688 TX-RX.4@82.178,87.556 ; TX-RX.3@79.876,87.556 TX-RX.4@82.178,86.688 ; TX-RX.3@79.876,87.556 TX-RX.4@82.178,86.688 ; TX-RX.3@79.876,87.556 TX-RX.4@82.178,86.688 ; TX-RX.3@79.876,87.556 TX-RX.4@82.178,86.688 ; P3.2@80.578,77.764 81.026,80.274 ; P3.2@80.578,77.764 81.026,80.274 ; P3.2@80.578,77.764 81.026,80.274 ; P3.2@80.578,77.764 81.026,80.274 ; P3.2 81.026,80.274 ; P3.2 81.026,80.274 ; P3.2 81.026,81.534 82.296,82.804 TX-RX.4 ; 81.026,80.274 P3.2@81.474,77.764 ; 81.026,80.274 P3.2@81.474,77.764 ; 81.026,80.274 P3.2@81.474,77.764 ; 81.026,80.274 P3.2@81.474,77.764 ; TX-RX.4@81.848,87.082 82.296,84.572 ; TX-RX.4@81.848,87.082 82.296,84.572 ; TX-RX.4@81.848,87.082 82.296,84.572 ; TX-RX.4@81.848,87.082 82.296,84.572 ; 82.296,84.572 TX-RX.4@82.744,87.082 ; 82.296,84.572 TX-RX.4 ; 82.296,84.572 TX-RX.4@82.744,87.082 ; 82.296,84.572 TX-RX.4 ; 82.296,84.572 TX-RX.4@82.744,87.082 ; 82.296,84.572 TX-RX.4@82.744,87.082
NetP3_3: P3.3 TX-RX.1 TX-RX.2 | length 507.9
  Bottom Layer w0.6: TX-RX.1@74.636,86.674 TX-RX.2@77.176,86.674 ; TX-RX.1@74.636,86.674 TX-RX.2@77.176,86.674 ; TX-RX.1@74.636,86.674 TX-RX.2@77.176,86.674 ; TX-RX.1@74.636,86.674 TX-RX.2@77.176,86.674 ; TX-RX.1@74.636,86.674 TX-RX.2@77.176,86.674 ; TX-RX.1@74.636,87.57 TX-RX.2@77.176,87.57 ; TX-RX.1@74.636,87.57 TX-RX.2@77.176,87.57 ; TX-RX.1@74.636,87.57 TX-RX.2@77.176,87.57 ; TX-RX.1@74.636,87.57 TX-RX.2@77.176,87.57 ; TX-RX.1@74.636,87.57 TX-RX.2@77.176,87.57 ; TX-RX.1@74.637,86.674 TX-RX.2@77.098,86.688 ; TX-RX.1@74.637,86.674 TX-RX.2@77.098,86.688 ; TX-RX.1@74.637,86.674 TX-RX.2@77.098,86.688 ; TX-RX.1@74.637,86.674 TX-RX.2@77.098,86.688 ; TX-RX.1@74.637,86.674 TX-RX.2@77.098,86.688 ; TX-RX.1@74.637,86.674 TX-RX.2@77.256,86.674 ; TX-RX.1@74.637,86.674 TX-RX.2@77.256,86.674 ; TX-RX.1@74.637,86.674 TX-RX.2@77.256,86.674 ; TX-RX.1@74.637,86.674 TX-RX.2@77.256,86.674 ; TX-RX.1@74.637,86.674 TX-RX.2@77.256,86.674 ; TX-RX.1@74.637,87.57 TX-RX.2@77.256,87.57 ; TX-RX.1@74.637,87.57 TX-RX.2@77.098,87.556 ; TX-RX.1@74.637,87.57 TX-RX.2@77.256,87.57 ; TX-RX.1@74.637,87.57 TX-RX.2@77.256,87.57 ; TX-RX.1@74.637,87.57 TX-RX.2@77.256,87.57 ; TX-RX.1@74.637,87.57 TX-RX.2@77.098,87.556 ; TX-RX.1@74.637,87.57 TX-RX.2@77.098,87.556 ; TX-RX.1@74.637,87.57 TX-RX.2@77.098,87.556 ; TX-RX.1@74.637,87.57 TX-RX.2@77.256,87.57 ; TX-RX.1@74.637,87.57 TX-RX.2@77.098,87.556 ; TX-RX.1 TX-RX.2 ; TX-RX.1 TX-RX.2@77.256,87.57 ; TX-RX.1 TX-RX.2@77.098,86.688 ; TX-RX.1 TX-RX.2 ; TX-RX.1 TX-RX.2@77.098,87.556 ; TX-RX.1 TX-RX.2 ; TX-RX.1 TX-RX.2@77.256,87.57 ; TX-RX.1 TX-RX.2@77.098,86.688 ; TX-RX.1 TX-RX.2 ; TX-RX.1 TX-RX.2@77.256,87.57 ; TX-RX.1 TX-RX.2@77.098,86.688 ; TX-RX.1 TX-RX.2 ; TX-RX.1 TX-RX.2@77.256,87.57 ; TX-RX.1 TX-RX.2@77.098,86.688 ; TX-RX.1 TX-RX.2 ; TX-RX.1 TX-RX.2@77.098,87.556 ; TX-RX.1 TX-RX.2 ; TX-RX.1 TX-RX.2@77.098,87.556 ; TX-RX.1 TX-RX.2 ; TX-RX.1 TX-RX.2@77.098,87.556 ; TX-RX.1 TX-RX.2 ; TX-RX.1 TX-RX.2 ; TX-RX.1 TX-RX.2@77.098,86.688 ; TX-RX.1 TX-RX.2@77.256,87.57 ; TX-RX.1 TX-RX.2 ; TX-RX.1 TX-RX.2@77.098,87.556 ; TX-RX.1 TX-RX.2 ; TX-RX.1 TX-RX.2@77.256,86.674 ; TX-RX.1 TX-RX.2@77.256,86.674 ; TX-RX.1 TX-RX.2@77.256,86.674 ; TX-RX.1 TX-RX.2@77.256,86.674 ; TX-RX.1 TX-RX.2@77.256,86.674 ; TX-RX.1 TX-RX.2 ; TX-RX.1 TX-RX.2@77.176,87.57 ; TX-RX.1 TX-RX.2@77.176,86.674 ; TX-RX.1 TX-RX.2 ; TX-RX.1 TX-RX.2@77.176,87.57 ; TX-RX.1 TX-RX.2@77.176,86.674 ; TX-RX.1 TX-RX.2 ; TX-RX.1 TX-RX.2@77.176,87.57 ; TX-RX.1 TX-RX.2@77.176,86.674 ; TX-RX.1 TX-RX.2 ; TX-RX.1 TX-RX.2@77.176,87.57 ; TX-RX.1 TX-RX.2@77.176,86.674 ; TX-RX.1 TX-RX.2 ; TX-RX.1 TX-RX.2@77.176,86.674 ; TX-RX.1 TX-RX.2@77.176,87.57 ; TX-RX.1 TX-RX.2 ; TX-RX.1@74.716,86.674 TX-RX.2 ; TX-RX.1@74.716,86.674 TX-RX.2 ; TX-RX.1@74.716,86.674 TX-RX.2 ; TX-RX.1@74.716,86.674 TX-RX.2 ; TX-RX.1@74.716,86.674 TX-RX.2 ; TX-RX.1@74.716,86.674 TX-RX.2 ; TX-RX.1@74.716,86.674 TX-RX.2 ; TX-RX.1@74.716,86.674 TX-RX.2 ; TX-RX.1@74.716,86.674 TX-RX.2 ; TX-RX.1@74.716,86.674 TX-RX.2 ; TX-RX.1@74.716,86.674 TX-RX.2 ; TX-RX.1@74.716,86.674 TX-RX.2 ; TX-RX.1@74.716,86.674 TX-RX.2 ; TX-RX.1@74.716,86.674 TX-RX.2 ; TX-RX.1@74.716,86.674 TX-RX.2 ; TX-RX.1@74.716,86.674 TX-RX.2 ; TX-RX.1@74.716,86.674 TX-RX.2 ; TX-RX.1@74.716,86.674 TX-RX.2 ; TX-RX.1@74.716,86.674 TX-RX.2 ; TX-RX.1@74.716,86.674 TX-RX.2@77.098,87.556 ; TX-RX.1@74.716,86.674 TX-RX.2@77.256,86.674 ; TX-RX.1@74.716,86.674 TX-RX.2 ; TX-RX.1@74.716,86.674 TX-RX.2@77.098,87.556 ; TX-RX.1@74.716,86.674 TX-RX.2@77.256,86.674 ; TX-RX.1@74.716,86.674 TX-RX.2 ; TX-RX.1@74.716,86.674 TX-RX.2@77.098,87.556 ; TX-RX.1@74.716,86.674 TX-RX.2@77.256,86.674 ; TX-RX.1@74.716,86.674 TX-RX.2 ; TX-RX.1@74.716,86.674 TX-RX.2@77.098,87.556 ; TX-RX.1@74.716,86.674 TX-RX.2@77.256,86.674 ; TX-RX.1@74.716,86.674 TX-RX.2 ; TX-RX.1@74.716,86.674 TX-RX.2@77.256,86.674 ; TX-RX.1@74.716,86.674 TX-RX.2@77.098,87.556 ; TX-RX.1@74.716,86.674 TX-RX.2 ; TX-RX.1@74.716,87.57 TX-RX.2 ; TX-RX.1@74.716,87.57 TX-RX.2 ; TX-RX.1@74.716,87.57 TX-RX.2 ; TX-RX.1@74.716,87.57 TX-RX.2 ; TX-RX.1@74.716,87.57 TX-RX.2 ; TX-RX.1@74.716,87.57 TX-RX.2 ; TX-RX.1@74.716,87.57 TX-RX.2 ; TX-RX.1@74.716,87.57 TX-RX.2 ; TX-RX.1@74.716,87.57 TX-RX.2 ; TX-RX.1@74.716,87.57 TX-RX.2 ; TX-RX.1@74.716,87.57 TX-RX.2 ; TX-RX.1@74.716,87.57 TX-RX.2 ; TX-RX.1@74.716,87.57 TX-RX.2 ; TX-RX.1@74.716,87.57 TX-RX.2 ; TX-RX.1@74.716,87.57 TX-RX.2 ; TX-RX.1@74.716,87.57 TX-RX.2 ; TX-RX.1@74.716,87.57 TX-RX.2 ; TX-RX.1@74.716,87.57 TX-RX.2 ; TX-RX.1@74.716,87.57 TX-RX.2 ; TX-RX.1@74.716,87.57 TX-RX.2@77.256,87.57 ; TX-RX.1@74.716,87.57 TX-RX.2@77.098,86.688 ; TX-RX.1@74.716,87.57 TX-RX.2 ; TX-RX.1@74.716,87.57 TX-RX.2@77.256,87.57 ; TX-RX.1@74.716,87.57 TX-RX.2@77.098,86.688 ; TX-RX.1@74.716,87.57 TX-RX.2 ; TX-RX.1@74.716,87.57 TX-RX.2@77.256,87.57 ; TX-RX.1@74.716,87.57 TX-RX.2@77.098,86.688 ; TX-RX.1@74.716,87.57 TX-RX.2 ; TX-RX.1@74.716,87.57 TX-RX.2@77.256,87.57 ; TX-RX.1@74.716,87.57 TX-RX.2@77.098,86.688 ; TX-RX.1@74.716,87.57 TX-RX.2 ; TX-RX.1@74.716,87.57 TX-RX.2@77.098,86.688 ; TX-RX.1@74.716,87.57 TX-RX.2@77.256,87.57 ; TX-RX.1@74.716,87.57 TX-RX.2 ; TX-RX.1@74.791,86.687 TX-RX.2@77.256,87.57 ; TX-RX.1@74.791,86.687 TX-RX.2@77.256,87.57 ; TX-RX.1@74.791,86.687 TX-RX.2@77.256,87.57 ; TX-RX.1@74.791,86.687 TX-RX.2@77.256,87.57 ; TX-RX.1@74.791,86.687 TX-RX.2@77.256,87.57 ; TX-RX.1@74.791,87.557 TX-RX.2@77.256,86.674 ; TX-RX.1@74.791,87.557 TX-RX.2@77.256,86.674 ; TX-RX.1@74.791,87.557 TX-RX.2@77.256,86.674 ; TX-RX.1@74.791,87.557 TX-RX.2@77.256,86.674 ; TX-RX.1@74.791,87.557 TX-RX.2@77.256,86.674 ; TX-RX.1@74.794,86.688 TX-RX.2@77.176,87.57 ; TX-RX.1@74.794,86.688 TX-RX.2@77.176,87.57 ; TX-RX.1@74.794,86.688 TX-RX.2@77.176,87.57 ; TX-RX.1@74.794,86.688 TX-RX.2@77.176,87.57 ; TX-RX.1@74.794,86.688 TX-RX.2@77.176,87.57 ; TX-RX.1@74.794,87.556 TX-RX.2@77.176,86.674 ; TX-RX.1@74.794,87.556 TX-RX.2@77.176,86.674 ; TX-RX.1@74.794,87.556 TX-RX.2@77.176,86.674 ; TX-RX.1@74.794,87.556 TX-RX.2@77.176,86.674 ; TX-RX.1@74.794,87.556 TX-RX.2@77.176,86.674 ; TX-RX.1@74.796,86.688 TX-RX.2@77.098,87.556 ; TX-RX.1@74.796,86.688 TX-RX.2@77.098,87.556 ; TX-RX.1@74.796,86.688 TX-RX.2@77.098,87.556 ; TX-RX.1@74.796,86.688 TX-RX.2@77.098,87.556 ; TX-RX.1@74.796,86.688 TX-RX.2@77.098,87.556 ; TX-RX.1@74.796,87.556 TX-RX.2@77.098,86.688 ; TX-RX.1@74.796,87.556 TX-RX.2@77.098,86.688 ; TX-RX.1@74.796,87.556 TX-RX.2@77.098,86.688 ; TX-RX.1@74.796,87.556 TX-RX.2@77.098,86.688 ; TX-RX.1@74.796,87.556 TX-RX.2@77.098,86.688 ; TX-RX.2@76.768,87.082 77.216,84.572 ; TX-RX.2@76.768,87.082 77.216,84.572 ; TX-RX.2@76.768,87.082 77.216,84.572 ; TX-RX.2@76.768,87.082 77.216,84.572 ; 77.216,84.572 TX-RX.2@77.664,87.082 ; 77.216,84.572 TX-RX.2 ; 77.216,84.572 TX-RX.2@77.664,87.082 ; 77.216,84.572 TX-RX.2 ; 77.216,84.572 TX-RX.2@77.664,87.082 ; 77.216,84.572 TX-RX.2@77.664,87.082 ; TX-RX.2 77.216,83.058 78.486,81.788 P3.3 ; P3.3@78.038,77.764 78.486,80.274 ; P3.3@78.038,77.764 78.486,80.274 ; P3.3@78.038,77.764 78.486,80.274 ; P3.3@78.038,77.764 78.486,80.274 ; P3.3 78.486,80.274 ; P3.3 78.486,80.274 ; 78.486,80.274 P3.3@78.934,77.764 ; 78.486,80.274 P3.3@78.934,77.764 ; 78.486,80.274 P3.3@78.934,77.764 ; 78.486,80.274 P3.3@78.934,77.764
NetP3_4: P3.4 TX-RX.5 | length 91.9
  Bottom Layer w0.6: P3.4@75.498,77.764 75.946,80.274 ; P3.4@75.498,77.764 75.946,80.274 ; P3.4@75.498,77.764 75.946,80.274 ; P3.4@75.498,77.764 75.946,80.274 ; P3.4 75.946,80.274 ; P3.4 75.946,80.274 ; P3.4 75.946,83.221 73.126,86.041 73.126,88.203 73.595,88.672 76.226,88.672 TX-RX.5 ; 75.946,80.274 P3.4@76.394,77.764 ; 75.946,80.274 P3.4@76.394,77.764 ; 75.946,80.274 P3.4@76.394,77.764 ; 75.946,80.274 P3.4@76.394,77.764 ; 80.273,92.719 TX-RX.5 ; 80.273,92.719 TX-RX.5@81.954,95.034 ; 80.273,92.719 TX-RX.5@82.588,94.4 ; 80.273,92.719 TX-RX.5 ; 80.273,92.719 TX-RX.5@81.954,95.034 ; 80.273,92.719 TX-RX.5@82.588,94.4 ; 80.273,92.719 TX-RX.5 ; 80.273,92.719 TX-RX.5@81.954,95.034 ; 80.273,92.719 TX-RX.5@82.588,94.4 ; 80.273,92.719 TX-RX.5 ; 80.273,92.719 TX-RX.5@81.954,95.034 ; 80.273,92.719 TX-RX.5@82.588,94.4 ; 80.273,92.719 TX-RX.5@82.588,94.4 ; 80.273,92.719 TX-RX.5@81.954,95.034 ; 80.273,92.719 TX-RX.5
NetP3_5: P3.5 TX-RX.7 | length 82.9
  Bottom Layer w0.6: P3.5@72.958,77.764 73.406,80.274 ; P3.5@72.958,77.764 73.406,80.274 ; P3.5@72.958,77.764 73.406,80.274 ; P3.5@72.958,77.764 73.406,80.274 ; P3.5 73.406,80.274 ; P3.5 73.406,80.274 ; P3.5 73.406,84.205 72.026,85.585 72.026,88.659 73.139,89.772 74.695,89.772 77.216,92.293 ; 73.406,80.274 P3.5@73.854,77.764 ; 73.406,80.274 P3.5@73.854,77.764 ; 73.406,80.274 P3.5@73.854,77.764 ; 73.406,80.274 P3.5@73.854,77.764 ; TX-RX.7@76.768,94.701 77.216,92.293 ; TX-RX.7@76.768,94.701 77.216,92.293 ; TX-RX.7@76.768,94.701 77.216,92.293 ; TX-RX.7@76.768,94.701 77.216,92.293 ; TX-RX.7@76.768,94.701 77.216,92.293 ; 77.216,92.293 TX-RX.7 ; 77.216,92.293 TX-RX.7@77.664,94.701 ; 77.216,92.293 TX-RX.7 ; 77.216,92.293 TX-RX.7@77.664,94.701 ; 77.216,92.293 TX-RX.7 ; 77.216,92.293 TX-RX.7@77.664,94.701 ; 77.216,92.293 TX-RX.7 ; 77.216,92.293 TX-RX.7@77.664,94.701 ; 77.216,92.293 TX-RX.7 ; 77.216,92.293 TX-RX.7@77.664,94.701 ; 77.216,92.293 TX-RX.7
NetP4_1: BAUD.1 P4.1 | length 58.9
  Bottom Layer w0.6: BAUD.1@93.942,86.78 96.257,85.099 ; BAUD.1@93.942,86.78 96.257,85.099 ; BAUD.1@93.942,86.78 96.257,85.099 ; BAUD.1@93.942,86.78 96.257,85.099 ; BAUD.1 96.257,85.099 ; BAUD.1 96.257,85.099 ; BAUD.1 101.854,79.502 ; BAUD.1@94.576,87.414 96.257,85.099 ; BAUD.1@94.576,87.414 96.257,85.099 ; BAUD.1@94.576,87.414 96.257,85.099 ; BAUD.1@94.576,87.414 96.257,85.099 ; P4.1@101.408,77.781 101.854,79.502 ; P4.1@101.408,77.781 101.854,79.502 ; P4.1@101.408,77.781 101.854,79.502 ; P4.1@101.408,77.781 101.854,79.502 ; P4.1 101.854,79.502 ; P4.1 101.854,79.502 ; P4.1 101.854,79.502 ; 101.854,79.502 P4.1@102.3,77.781 ; 101.854,79.502 P4.1@102.3,77.781 ; 101.854,79.502 P4.1@102.3,77.781 ; 101.854,79.502 P4.1@102.3,77.781
NetP4_2: BAUD.8 P4.2 | length 75.5
  Bottom Layer w0.6: BAUD.8@93.786,94.702 94.234,92.192 ; BAUD.8@93.786,94.702 94.234,92.192 ; BAUD.8@93.786,94.702 94.234,92.192 ; BAUD.8@93.786,94.702 94.234,92.192 ; BAUD.8@93.786,94.702 94.234,92.192 ; 94.234,92.192 BAUD.8 ; 94.234,92.192 BAUD.8@94.682,94.702 ; 94.234,92.192 BAUD.8 ; 94.234,92.192 BAUD.8@94.682,94.702 ; 94.234,92.192 BAUD.8 ; 94.234,92.192 BAUD.8@94.682,94.702 ; 94.234,92.192 BAUD.8 ; 94.234,92.192 BAUD.8@94.682,94.702 ; 94.234,92.192 BAUD.8@94.682,94.702 ; 94.234,92.192 BAUD.8 ; BAUD.8 94.234,89.753 92.684,88.203 92.684,86.041 99.314,79.411 ; P4.2@98.868,77.784 99.314,79.411 ; P4.2@98.868,77.784 99.314,79.411 ; P4.2@98.868,77.784 99.314,79.411 ; P4.2@98.868,77.784 99.314,79.411 ; P4.2 99.314,79.411 ; P4.2 99.314,79.411 ; P4.2 99.314,79.411 ; 99.314,79.411 P4.2@99.76,77.784 ; 99.314,79.411 P4.2@99.76,77.784 ; 99.314,79.411 P4.2@99.76,77.784 ; 99.314,79.411 P4.2@99.76,77.784
NetP4_3: BAUD.2 P4.3 | length 71.2
  Bottom Layer w0.6: BAUD.2@96.482,86.78 98.797,85.099 ; BAUD.2@96.482,86.78 98.797,85.099 ; BAUD.2@96.482,86.78 98.797,85.099 ; BAUD.2@96.482,86.78 98.797,85.099 ; P4.3@96.49,77.375 98.324,76.174 ; P4.3@96.49,77.375 98.324,76.174 ; P4.3@96.49,77.375 98.324,76.174 ; P4.3@96.49,77.375 98.324,76.174 ; P4.3 98.324,76.174 ; P4.3 98.324,76.174 ; P4.3 98.324,76.174 ; BAUD.2 98.797,85.099 ; BAUD.2 98.797,85.099 ; BAUD.2 103.404,80.492 103.404,76.643 102.935,76.174 98.324,76.174 ; BAUD.2@97.116,87.414 98.797,85.099 ; BAUD.2@97.116,87.414 98.797,85.099 ; BAUD.2@97.116,87.414 98.797,85.099 ; BAUD.2@97.116,87.414 98.797,85.099 ; P4.3@97.123,78.008 98.324,76.174 ; P4.3@97.123,78.008 98.324,76.174 ; P4.3@97.123,78.008 98.324,76.174 ; P4.3@97.123,78.008 98.324,76.174
NetP4_4: BAUD.7 P4.4 | length 83
  Bottom Layer w0.6: BAUD.7@96.426,94.742 BAUD.7 ; P4.4@93.786,77.764 94.234,80.274 ; P4.4@93.786,77.764 94.234,80.274 ; P4.4@93.786,77.764 94.234,80.274 ; P4.4@93.786,77.764 94.234,80.274 ; P4.4 94.234,80.274 ; P4.4 94.234,80.274 ; P4.4 94.234,82.931 91.584,85.581 91.584,94.284 93.592,96.292 95.224,96.292 ; 94.234,80.274 P4.4@94.682,77.764 ; 94.234,80.274 P4.4@94.682,77.764 ; 94.234,80.274 P4.4@94.682,77.764 ; 94.234,80.274 P4.4@94.682,77.764 ; 95.224,96.292 BAUD.7 ; 95.224,96.292 BAUD.7@97.058,95.091 ; 95.224,96.292 BAUD.7@96.425,94.458 ; 95.224,96.292 BAUD.7 ; 95.224,96.292 BAUD.7@97.058,95.091 ; 95.224,96.292 BAUD.7@96.425,94.458 ; 95.224,96.292 BAUD.7 ; 95.224,96.292 BAUD.7@97.058,95.091 ; 95.224,96.292 BAUD.7@96.425,94.458 ; 95.224,96.292 BAUD.7 ; 95.224,96.292 BAUD.7@97.058,95.091 ; 95.224,96.292 BAUD.7@96.425,94.458 ; 95.224,96.292 BAUD.7 ; 95.224,96.292 BAUD.7@96.425,94.458 ; 95.224,96.292 BAUD.7@97.058,95.091 ; 95.224,96.292 BAUD.7
pads on no net: BAUD.3 BAUD.4 BAUD.5 BAUD.6

## Silkscreen, mask and mechanical layers (free items; w line width, h text height)
Top Overlay:
  text "." at 74.422,96.774 h1.52
  text "." at 79.629,96.774 h1.52
  text "." at 94.107,96.774 h1.52
Mechanical 1:
  lines w0.254: 48.895,71.501 48.895,110.363 108.204,110.363 108.204,71.501 48.895,71.501